# EAGLE board scheme (EAGLE 9.6.2)
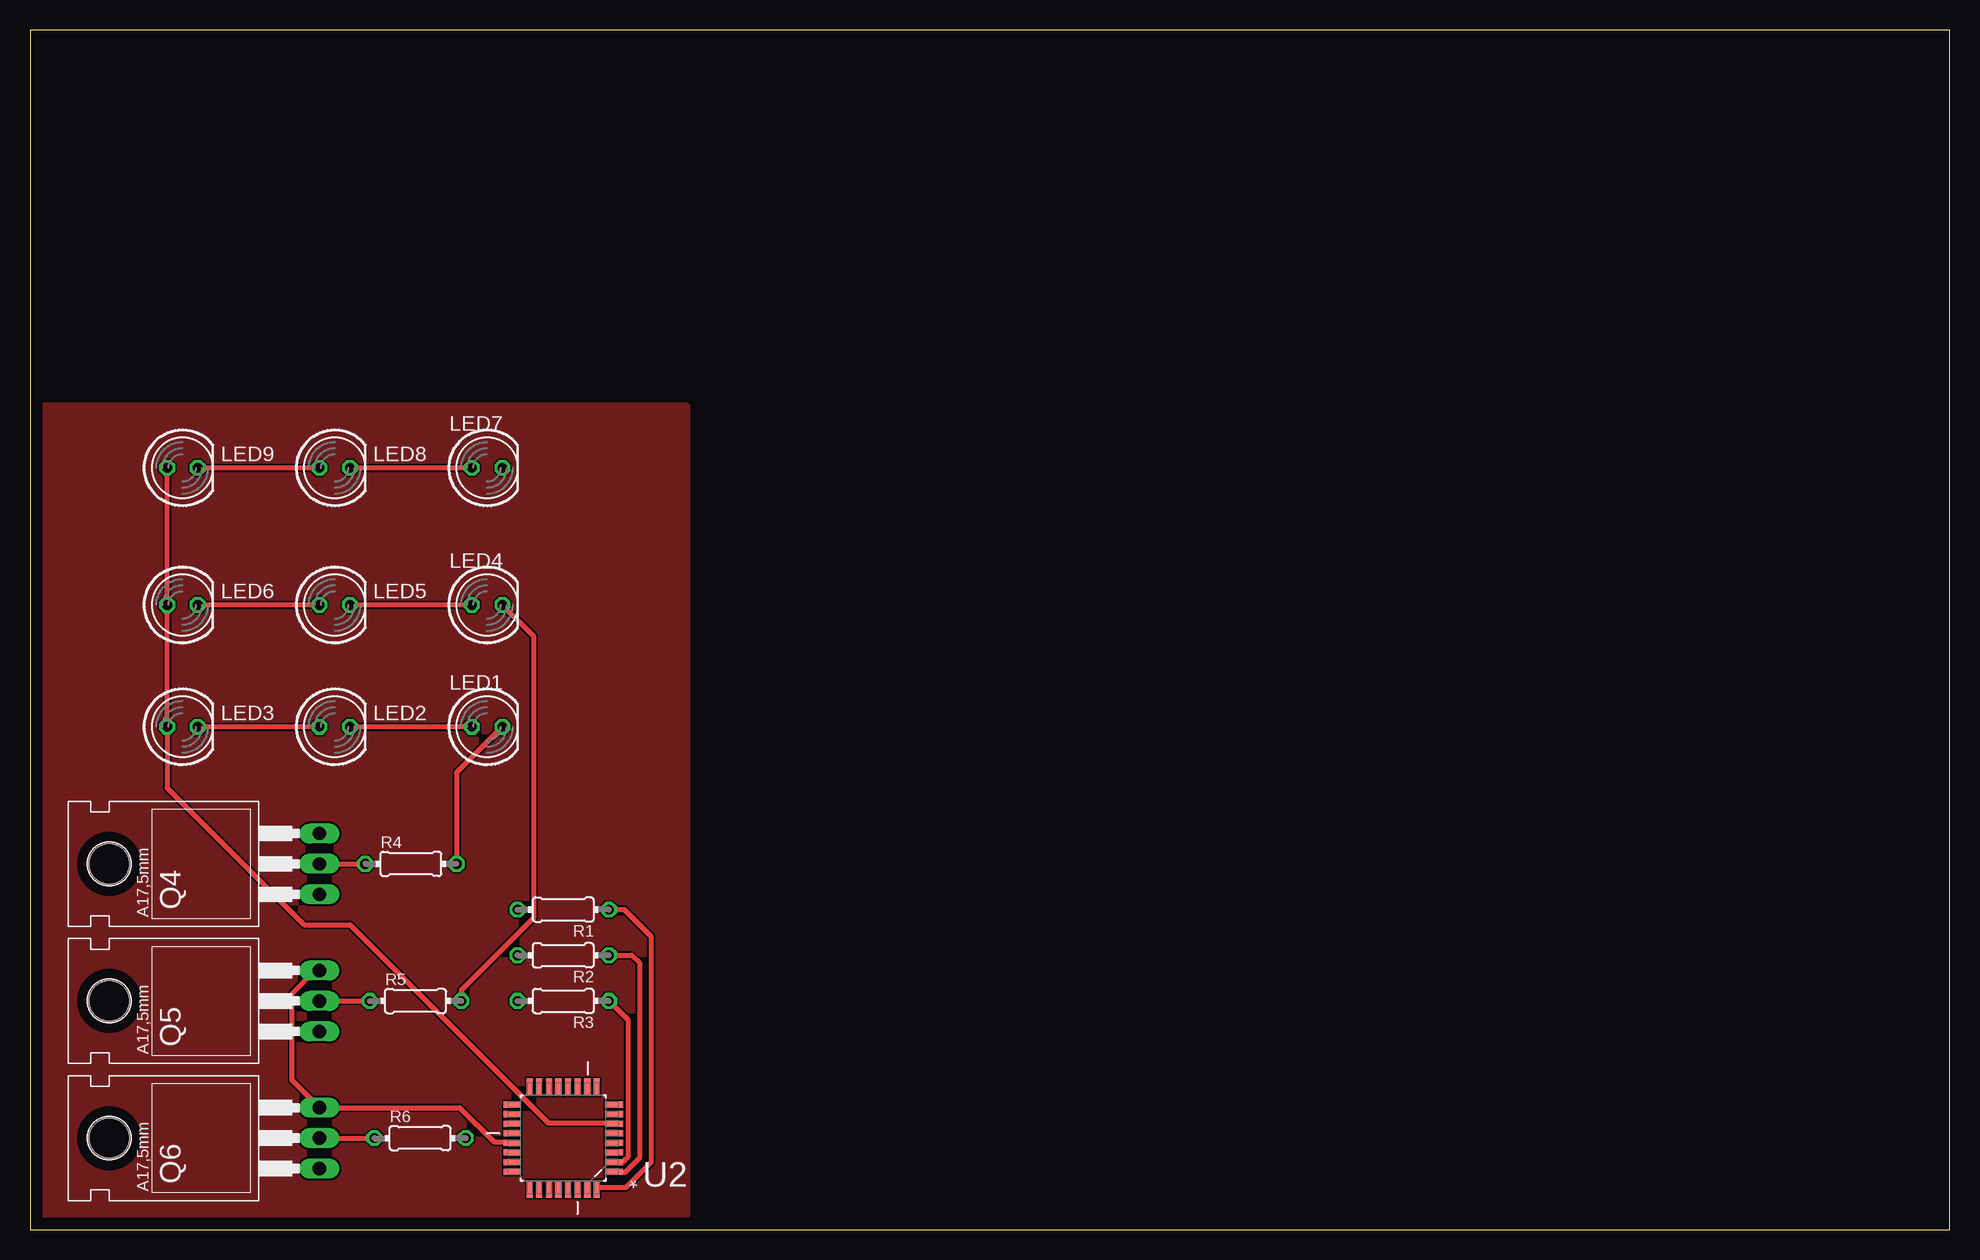
[diagram p0: board, top side]
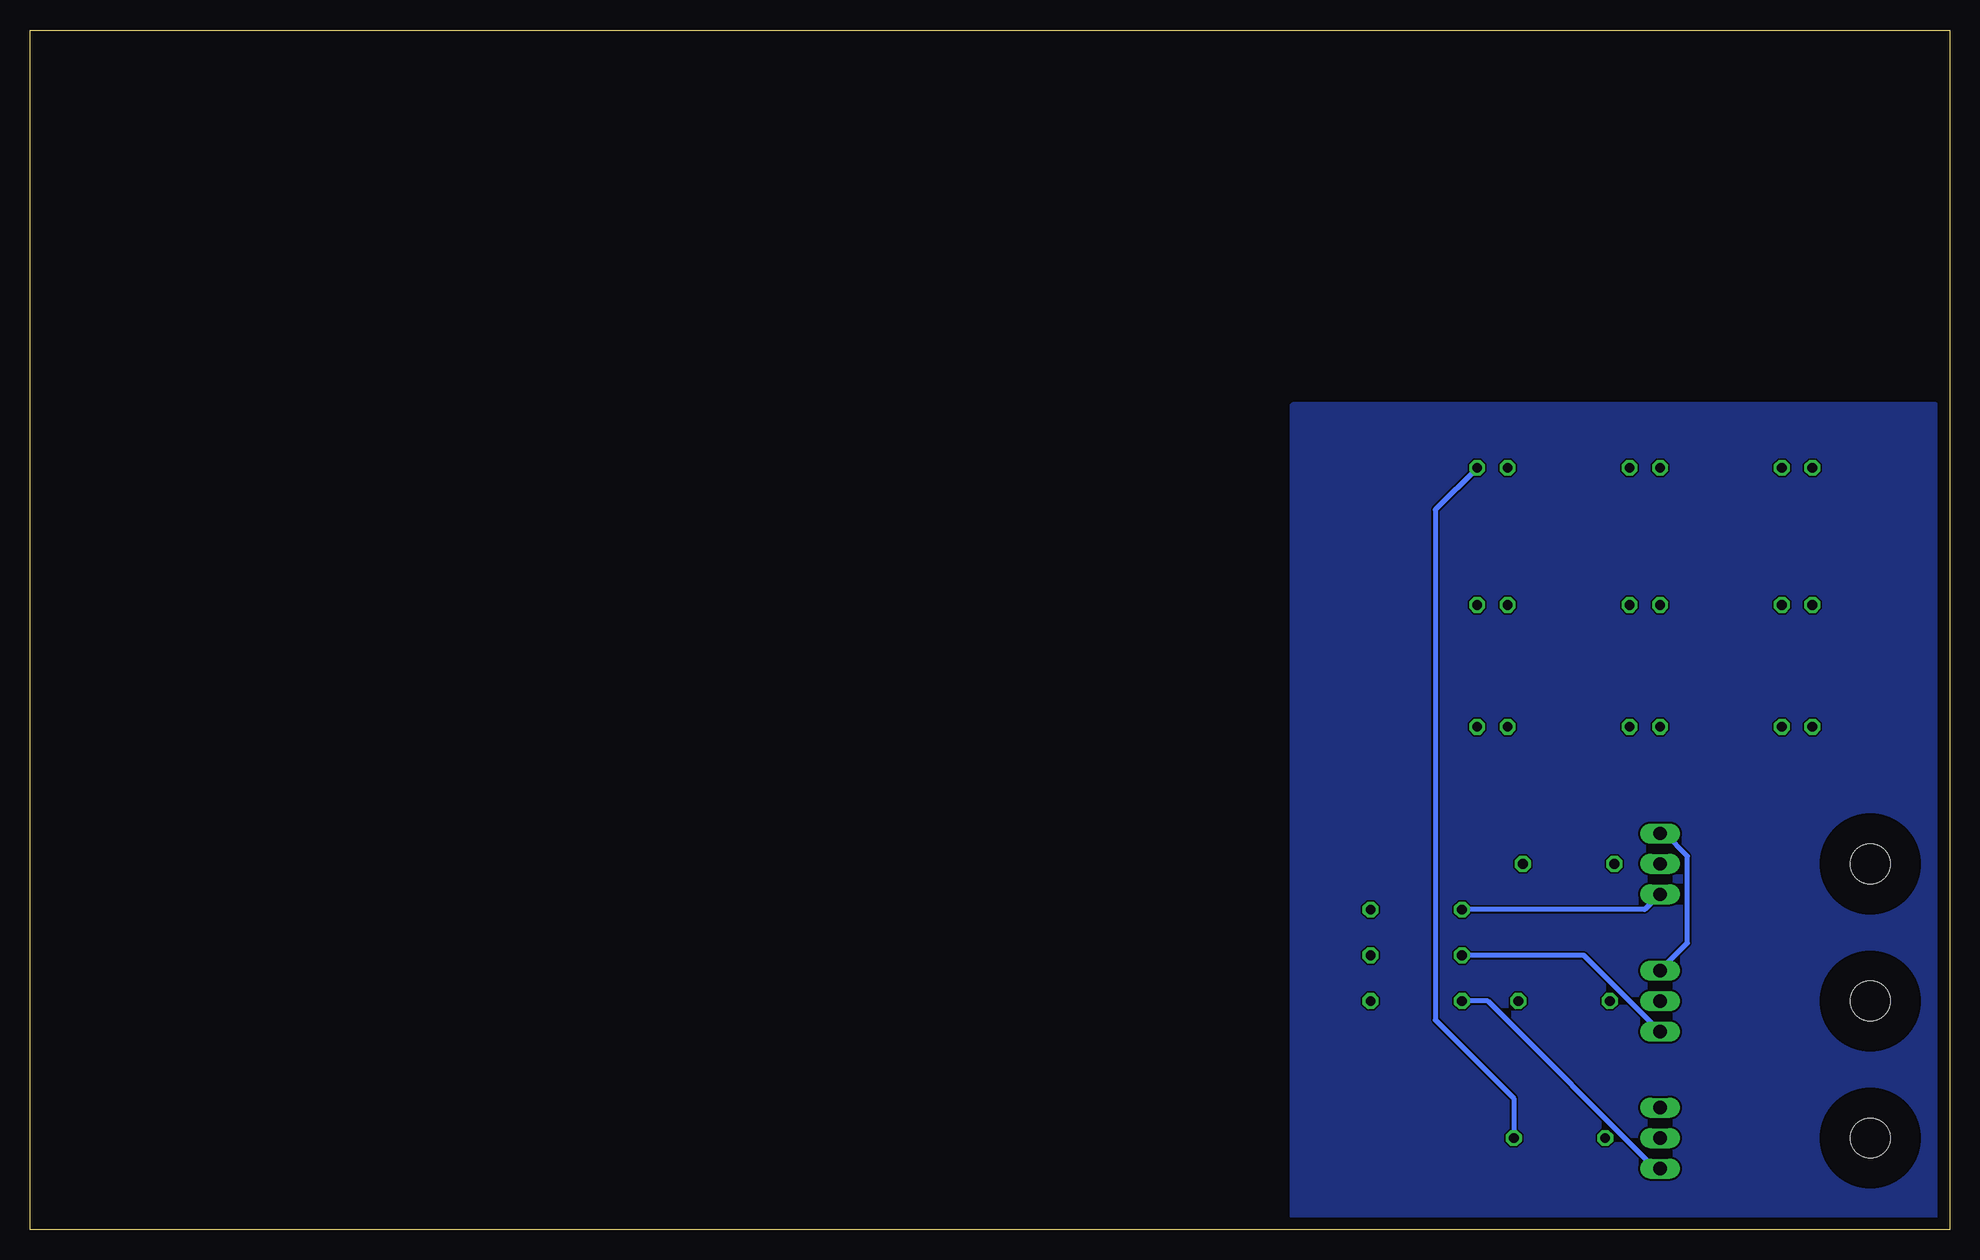
[diagram p1: board, bottom side, seen from below]

Size 160 x 100 mm. Coordinates in mm from the lower left corner, seen from the top.
Outline: 0,0 160,0 160,100 0,100 0,0
Copper layers (1*16): Top 0.035mm / dielectric 1.5mm / Bottom 0.035mm
Design rules "default": minimum track width 6mil, minimum drill 0.35mm, track to track 6mil, track to pad 6mil, pad to pad 6mil, via to via 6mil, smd to smd 6mil, copper to edge 40mil, drill to drill 6mil, minimum pad ring 10mil, minimum via ring 8mil, stop-mask expansion 4mil, vias tented up to drill 0mil, thermal gap 10mil

## Footprints (pad centres in the part's own frame; a part is rotated, then mirrored left to right if it is on the bottom)
LED5MM = drill 0.813 octagon: A -1.27,0; K 1.27,0
TO220 = drill 1.118 long: 1 -2.54,-6.35; 2 0,-6.35; 3 2.54,-6.35 | hole 3.302: 0,11.176
0204/7 = drill 0.813 octagon: 1 -3.81,0; 2 3.81,0
QFP80P900X900X120-32N = smd 1.473 x 0.508: 1 -4.242,2.794; 2 -4.242,2.007; 3 -4.242,1.194; 4 -4.242,0.406; 5 -4.242,-0.406; 6 -4.242,-1.194; 7 -4.242,-2.007; 8 -4.242,-2.794; 17 4.242,-2.794; 18 4.242,-2.007; 19 4.242,-1.194; 20 4.242,-0.406; 21 4.242,0.406; 22 4.242,1.194; 23 4.242,2.007; 24 4.242,2.794 | smd 0.508 x 1.473: 9 -2.794,-4.242; 10 -2.007,-4.242; 11 -1.194,-4.242; 12 -0.406,-4.242; 13 0.406,-4.242; 14 1.194,-4.242; 15 2.007,-4.242; 16 2.794,-4.242; 25 2.794,4.242; 26 2.007,4.242; 27 1.194,4.242; 28 0.406,4.242; 29 -0.406,4.242; 30 -1.194,4.242; 31 -2.007,4.242; 32 -2.794,4.242

## Placement (x,y rotation side)
LED1  [LED5MM]  38.1,41.91 0 top
LED2  [LED5MM]  25.4,41.91 0 top
LED3  [LED5MM]  12.7,41.91 0 top
LED4  [LED5MM]  38.1,52.07 0 top
LED5  [LED5MM]  25.4,52.07 0 top
LED6  [LED5MM]  12.7,52.07 0 top
LED7  [LED5MM]  38.1,63.5 0 top
LED8  [LED5MM]  25.4,63.5 0 top
LED9  [LED5MM]  12.7,63.5 0 top
Q4  BUZ10  [TO220]  17.78,30.48 90 top
Q5  BUZ10  [TO220]  17.78,19.05 90 top
Q6  BUZ10  [TO220]  17.78,7.62 90 top
R1  470  [0204/7]  44.45,26.67 180 top
R2  470  [0204/7]  44.45,22.86 180 top
R3  470  [0204/7]  44.45,19.05 180 top
R4  300  [0204/7]  31.75,30.48 0 top
R5  90  [0204/7]  32.13,19.05 0 top
R6  120  [0204/7]  32.51,7.62 0 top
U2  ATMEGA328P-AU  [QFP80P900X900X120-32N]  44.45,7.62 180 top

## Library data of the parts
LED1-LED9 = led
Q4-Q6 = transistor-fet
R1-R6 = rcl; SPICEPREFIX: R
U2 = Atmel-ATMEGA328P-AU; DESCRIPTION: 8-bit Microcontroller with In-System Programmable Flash; MPN: ATMEGA328P-AU; OC_FARNELL: 1715486; OC_NEWARK: 14R4631; PACKAGE: TQFP-32; SUPPLIER: Atmel

## Nets
AVCC: U2.18
GND: Q4.3 Q5.3 Q6.3 U2.21
N$1: LED4.K R5.2
N$2: LED4.A LED5.K
N$3: LED1.K R4.2
N$4: LED1.A LED2.K
N$5: LED2.A LED3.K
N$6: LED5.A LED6.K
N$7: LED7.K R6.2
N$8: LED7.A LED8.K
N$9: LED8.A LED9.K
N$10: Q6.2 R6.1
N$11: Q5.2 R5.1
N$12: Q4.2 R4.1
N$13: Q4.1 R1.2
N$14: Q5.1 R2.2
N$15: Q6.1 R3.2
N$17: R2.1 U2.1
N$18: R3.1 U2.2
N$19: R1.1 U2.32
VCC: LED3.A LED6.A LED9.A U2.6
VCC_2: U2.4

## Tracks (layer width: path | path; a pad name or v marks a point on that pad's centre or on a via)
GND
  Top 0.152: 40.01,7.3 U2.21
  Top 0.406: 40.01,7.3 38.67,7.3 35.81,10.16 Q6.3 21.84,12.45 21.84,19.68 23.75,21.59 Q5.3
  Bottom 0.406: Q4.3 23.75,33.02 21.84,31.11 21.84,23.88 Q5.3
N$1
  Top 0.406: R5.2 35.94,19.94 41.97,25.97 41.97,49.47 LED4.K
N$2
  Top 0.406: LED4.A LED5.K
N$3
  Top 0.406: R4.2 35.56,38.1 LED1.K
N$4
  Top 0.406: LED1.A LED2.K
N$5
  Top 0.406: LED2.A LED3.K
N$6
  Top 0.406: LED5.A LED6.K
N$7
  Bottom 0.406: R6.2 36.32,10.92 42.86,17.46 42.86,60.01 LED7.K
N$8
  Top 0.406: LED7.A LED8.K
N$9
  Top 0.406: LED8.A LED9.K
N$10
  Top 0.406: Q6.2 R6.1
N$11
  Top 0.406: Q5.2 R5.1
N$12
  Top 0.406: Q4.2 R4.1
N$13
  Bottom 0.406: R1.2 25.4,26.67 Q4.1
N$14
  Bottom 0.406: R2.2 30.48,22.86 Q5.1
N$15
  Bottom 0.406: R3.2 38.48,19.05 24.51,5.08 Q6.1
N$17
  Top 0.406: R2.1 50.16,22.86 50.8,22.23 50.8,5.97 49.59,4.76 48.9,4.76 U2.1
N$18
  Top 0.406: R3.1 49.85,17.46 49.85,6.03 49.53,5.71 49.33,5.61 U2.2
N$19
  Top 0.406: 47.36,3.49 49.66,3.49 51.75,5.59 51.75,24.45 49.53,26.67 R1.1 | 47.36,3.49 | 47.36,3.49 U2.32
PCB
  pour Top: 1.27,68.58 54.61,68.58 54.61,1.27 1.27,1.27
PCB-BOTTOM
  pour Bottom: 1.27,68.58 54.61,68.58 54.61,1.27 1.27,1.27
VCC
  Top 0.152: 48.58,8.89 U2.6
  Top 0.406: 48.58,8.89 43.18,8.89 26.67,25.4 22.86,25.4 11.43,36.83 LED3.A LED6.A LED9.A